# Altium PCB roneMotorBoard-v9.PcbDoc (part 1 of 2)
Units mil, origin at the board's own origin, x right, y up, seen from the top; angles counter-clockwise.
Board outline 3702 x 3936.38 mil, 2 copper layers (Top Layer, Bottom Layer); 104 components, 83 nets, 397 pads, 285 vias.
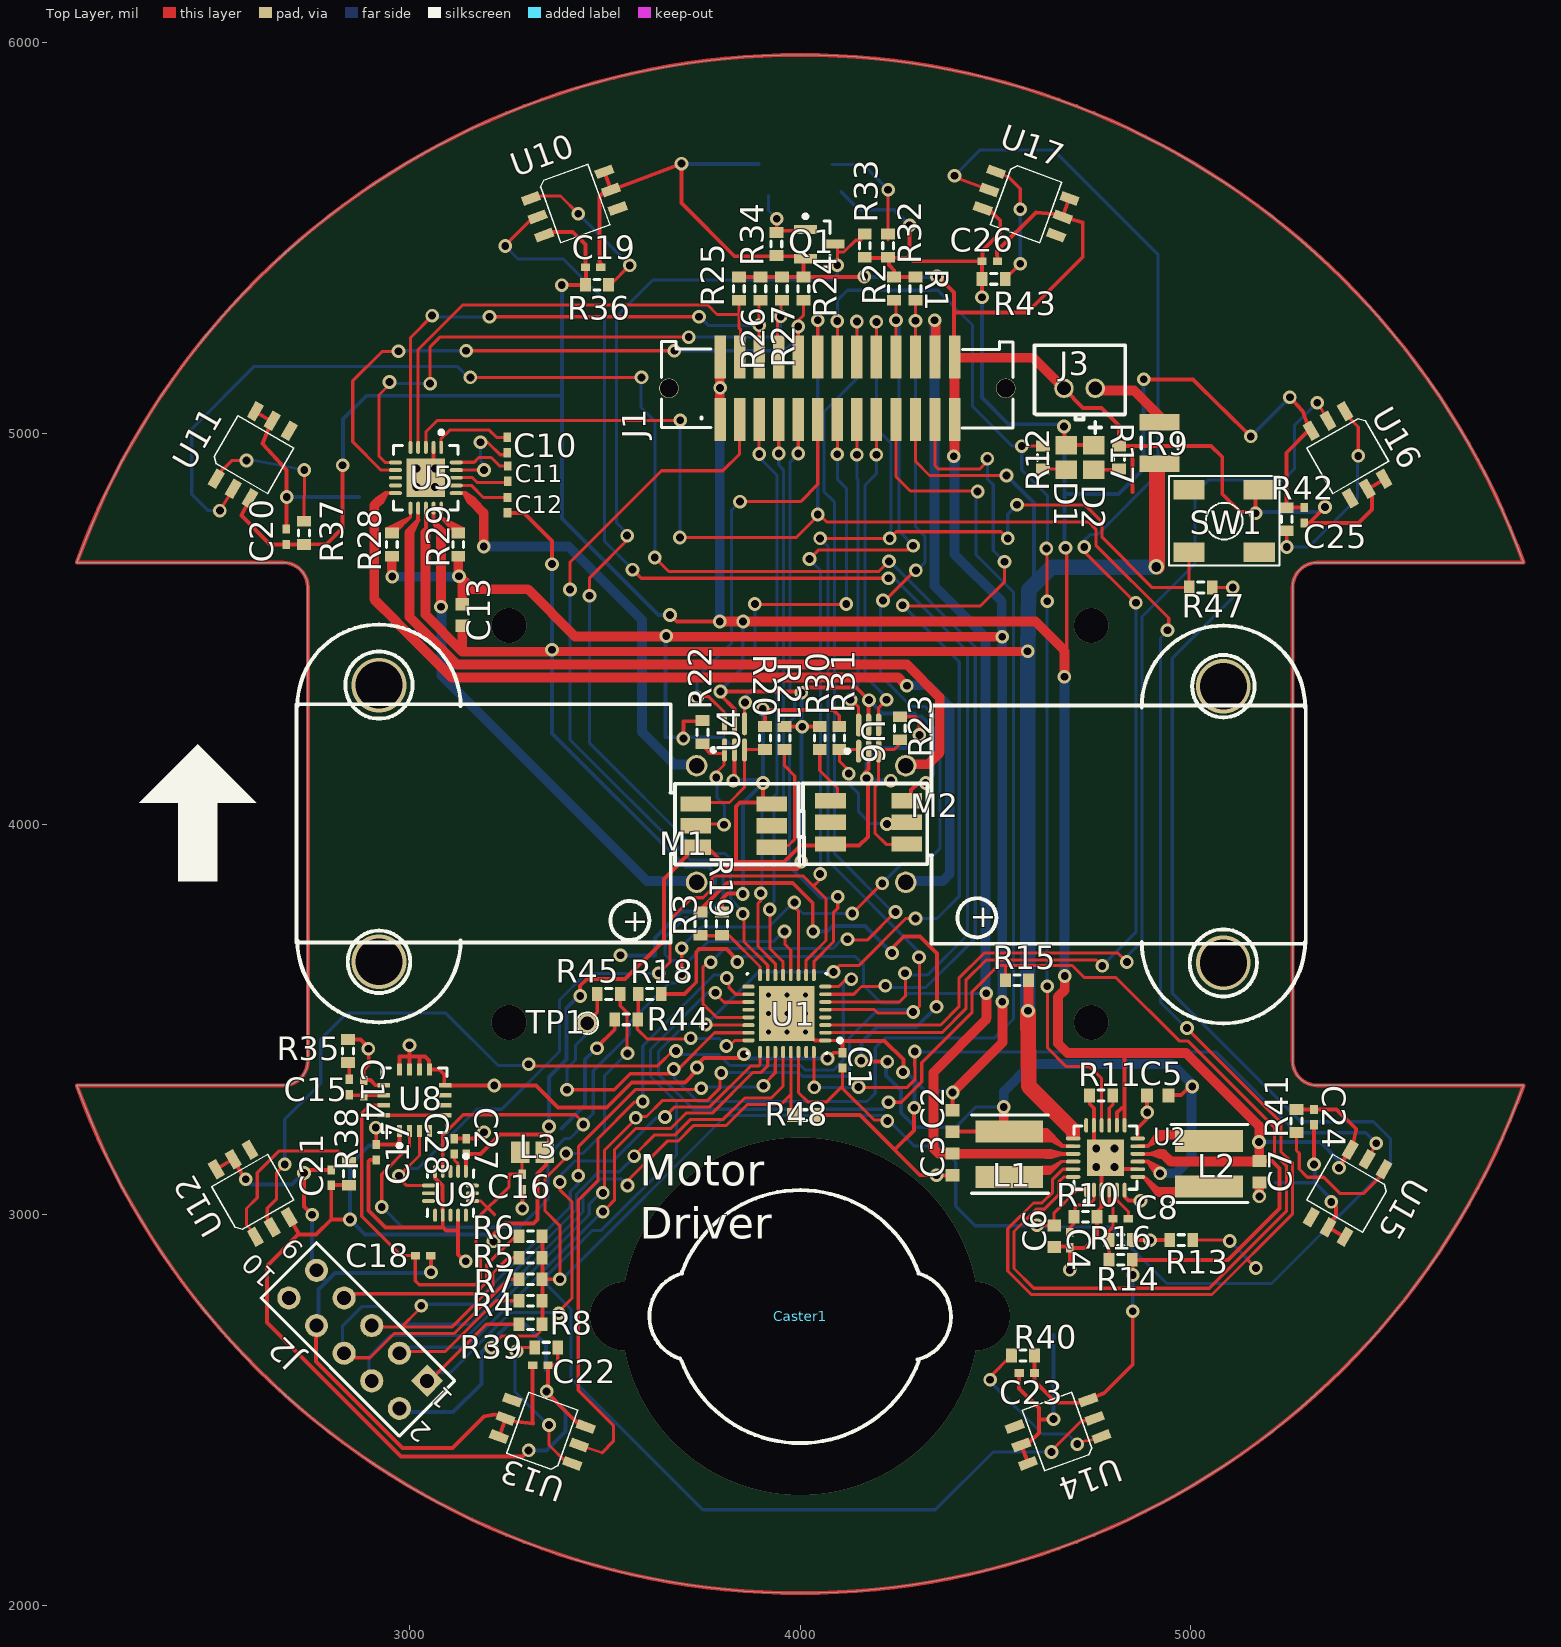
[diagram p0: Top Layer view]
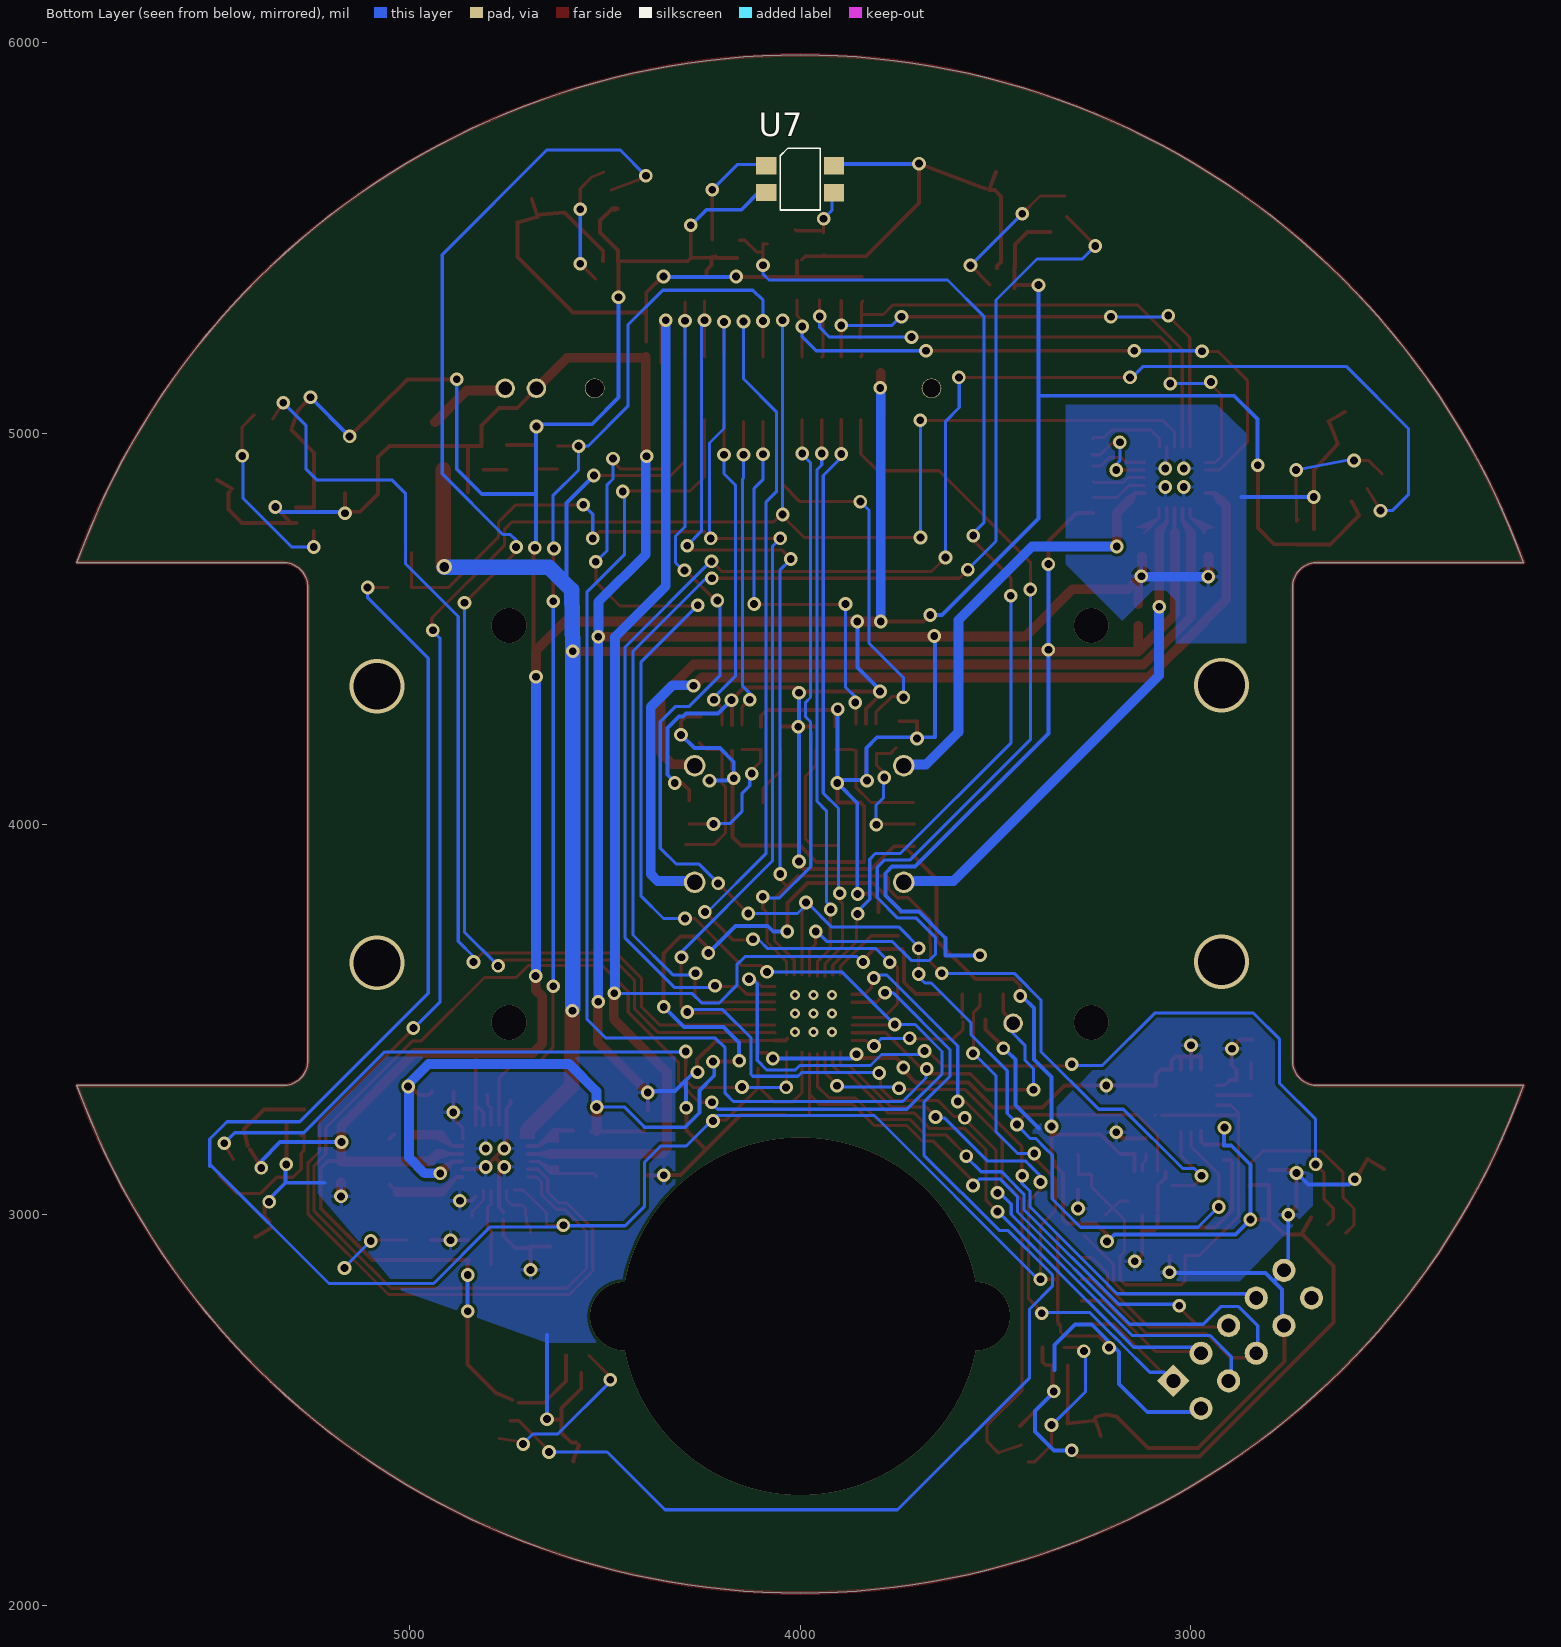
[diagram p1: Bottom Layer view, seen from below]

## Layer stack, top to bottom
Top Layer: signal copper 1.4
Dielectric: dielectric 12.6, FR-4, Dk 4.8
Bottom Layer: signal copper 1.4

## Board outline
2149,3331 2677,3331 ccw(c2677,3394) 2740,3394 2740,4606 ccw(c2677,4606) 2677,4669 2149,4669 cw(c4000,4000) 5851,4669 5323,4669 ccw(c5323,4606) 5260,4606 5260,3394 ccw(c5323,3394) 5323,3331 5851,3331 cw(c4000,4000)

## Design rules (kind name [scope] priority, off if disabled: settings)
Clearance [All] p1: gap=8
PolygonConnect [All] p1: connectstyle=Relief reliefconductorwidth=10 reliefentries=4 polygonreliefangle="90 Angle"
RoutingVias RoutingVias_4 [(IsVia AND InNetClass('All Nets'))] p1: holewidth=20 width=35 viastyle="Through Hole" minholewidth=20 minwidth=35 maxholewidth=20 maxwidth=35
RoutingVias RoutingVias_3 [(IsVia AND InNetClass('All Nets'))] p2: holewidth=20 width=35 viastyle="Through Hole" minholewidth=20 minwidth=35 maxholewidth=20 maxwidth=35
RoutingVias RoutingVias_2 [(IsVia AND InNetClass('All Nets'))] p3: holewidth=20 width=35 viastyle="Through Hole" minholewidth=20 minwidth=35 maxholewidth=20 maxwidth=35
RoutingVias RoutingVias_1 [(IsVia AND InNetClass('All Nets'))] p4: holewidth=20 width=35 viastyle="Through Hole" minholewidth=20 minwidth=35 maxholewidth=20 maxwidth=35
RoutingVias [All] p5: holewidth=20 width=35 viastyle="Through Hole" minholewidth=20 minwidth=35 maxholewidth=20 maxwidth=35
SMDNeckDown [All] p1: percent=50.000
SilkscreenOverComponentPads [All] p1: minsilkscreentomaskgap=10
SolderMaskExpansion [All] p1: expansion=4
Width "Schematic Width Constraint_8" [InNet('3.3V')] p1: maxlimit=100 minlimit=10 preferedwidth=25 minimp=50.000000 maximp=50.000000 favimp=50.000000
Width "Schematic Width Constraint_7" [InNet('VBAT')] p2: maxlimit=50 minlimit=10 preferedwidth=25 minimp=50.000000 maximp=50.000000 favimp=50.000000
Width "Schematic Width Constraint_6" [InNet('VBAT +300')] p3: maxlimit=25 minlimit=10 preferedwidth=25 minimp=50.000000 maximp=50.000000 favimp=50.000000
Width "Schematic Width Constraint_5" [InNet('NetJ3_1')] p4: maxlimit=25 minlimit=10 preferedwidth=25 minimp=50.000000 maximp=50.000000 favimp=50.000000
Width "Schematic Width Constraint_4" [InNet('NetL2_1')] p5: maxlimit=25 minlimit=10 preferedwidth=25 minimp=50.000000 maximp=50.000000 favimp=50.000000
Width "Schematic Width Constraint_3" [InNet('NetL2_2')] p6: maxlimit=25 minlimit=10 preferedwidth=25 minimp=50.000000 maximp=50.000000 favimp=50.000000
Width "Schematic Width Constraint_2" [InNet('5VUSB')] p7: maxlimit=25 minlimit=10 preferedwidth=25 minimp=50.000000 maximp=50.000000 favimp=50.000000
Width "Schematic Width Constraint" [InNet('GND')] p8: maxlimit=25 minlimit=10 preferedwidth=25 minimp=50.000000 maximp=50.000000 favimp=50.000000
Width "Schematic Width Constraint_12" [InNet('MOT_0B')] p9: maxlimit=25 minlimit=10 preferedwidth=20 minimp=50.000000 maximp=50.000000 favimp=50.000000
Width "Schematic Width Constraint_11" [InNet('MOT_0A')] p10: maxlimit=25 minlimit=10 preferedwidth=20 minimp=50.000000 maximp=50.000000 favimp=50.000000
Width "Schematic Width Constraint_10" [InNet('MOT1_B')] p11: maxlimit=25 minlimit=10 preferedwidth=20 minimp=50.000000 maximp=50.000000 favimp=50.000000
Width "Schematic Width Constraint_9" [InNet('MOT1_A')] p12: maxlimit=25 minlimit=10 preferedwidth=20 minimp=50.000000 maximp=50.000000 favimp=50.000000
Width MotorWidth [InNetClass('MotorNets')] p13: maxlimit=25 minlimit=8 preferedwidth=25
Width [All] p14: maxlimit=8 minlimit=8 preferedwidth=8
27 further rules are at their usual default settings.

## Classes and differential pairs
component class motorEncoder: C10 C11 C12 C13 Caster1 CasterBack1 M1 M2 M? R20 R21 R22 R23 R24 R25 R26 R27 R28 R29 R30 R31 U4 U5 U6
component class BumpSensors: C19 C20 C21 C22 C23 C24 C25 C26 R36 R37 R38 R39 R40 R41 R42 R43 U10 U11 U12 U13 U14 U15 U16 U17
component class GyroAccelHeaders: C14 C15 C16 C17 C18 C27 C28 L3 R35 U8 U9
component class MSP430: C1 J1 J2 R1 R2 R4 R5 R6 R7 R8 R45 R47 R48 SW1 TP1 U1
component class power: C2 C3 C4 C5 C6 C7 C8 C9 D1 D2 J3 L1 L2 R3 R9 R10 R11 R12 R13 R14 R15 R16 R17 R18 R19 R44 U2 U3
component class LineCliffSensors: Q1 R32 R33 R34 U7

## Components (designator, comment, footprint, x,y, rotation, side; value= is the part's Value field where it differs from the comment)
C1 "Cap Semi" CAPC1005L 4108,3395 r270 top
C2 "Cap" CAPC1608L 4390,3240 r270 top
C3 "Cap" CAPC1608L 4390,3129 r90 top
C4 "Cap" CAPC1005L 4690,2935 r90 top
C5 "Cap" CAPC1608L 4915,3305 r180 top
C6 "Cap" CAPC1608L 4650,2945 r270 top
C7 "Cap" CAPC1608L 5175,3110 r90 top
C8 "Cap" CAPC1005L 4820,2990 r0 top
C10 "Cap Semi" CAPC1005L 3250,4970 r90 top
C11 "Cap Semi" CAPC1005L 3251.31,4896.63 r90 top
C12 "Cap Semi" CAPC1005L 3251,4816 r90 top
C13 "Cap Semi" CAPC1608L 3135,4535 r270 top
C14 "Cap Semi" CAPC1005L 2883,3324 r90 top
C15 "Cap Semi" CAPC1005L 2846,3327 r90 top
C16 "Cap Semi" CAPC1005L 3289,3084 r90 top
C17 "Cap Semi" CAPC1005L 2915,3160 r90 top
C18 "Cap Semi" CAPC1005L 3035,2895 r180 top
C19 "Cap Semi" CAPC1005L 3470,5425 r180 top
C20 "Cap Semi" CAPC1005L 2685,4735 r270 top locked
C21 "Cap Semi" CAPC1005L 2800,3095 r270 top
C22 "Cap Semi" CAPC1005L 3335,2615 r0 top
C23 "Cap Semi" CAPC1005L 4580,2595 r0 top
C24 "Cap Semi" CAPC1005L 5315,3250 r90 top locked
C25 "Cap Semi" CAPC1005L 5290,4790 r90 top
C26 "Cap Semi" CAPC1005L 4485,5440 r180 top locked
C27 "Cap Semi" CAPC1005L 3145,3175 r270 top
C28 "Cap Semi" CAPC1005L 3115,3175 r270 top
Caster1 "non connect" "3/4\"CASTER2" 4000,2740 r180 top locked
D1 "Charge" INDC2012L 4681,4938 r270 top
D2 "Power" INDC2012L 4751,4938 r270 top
J1 "HCOMM/MOT" "HeaderSM 13x2" 4095,5115 r90 top locked
J2 "JTAG" HDR2X5 3045,2575 r135 top
J3 "Bat" BatteryConnJST 4715,5115 r180 top
L1 "3.3uH" IndPow 4535,3155 r90 top
L2 "2.2uH" IndPow 5046,3131 r90 top locked
L3 "Inductor" INDC2012L 3315,3160 r0 top
M1 "motorEncoder_V7b" motorEncoder_V7b 3830,4000 r180 top locked
M2 "motorEncoder_V7b" motorEncoder_V7b 4175,4000 r0 top locked
Q1 "NPN" SOT-23 4049,5484 r0 top
R1 "Res3" RESC1608L 4295,5370 r90 top
R2 "Res3" RESC1608L 4240,5370 r90 top
R3 "Res3" RESC1608L 3745,3745 r90 top
R4 "Res3" RESC1608L 3310,2780 r0 top
R5 "Res3" RESC1608L 3310,2890 r0 top
R6 "Res3" RESC1608L 3310,2945 r0 top
R7 "Res Semi" RESC1608L 3310,2835 r0 top
R8 "Res3" RESC1608L 3310,2720 r0 top
R9 "Res3" RESC3225L 4920,4975 r90 top
R10 "Res3" RESC1608L 4730,2995 r180 top
R11 "Res3" RESC1608L 4770,3305 r180 top
R12 "Res3" RESC1608L 4621,4938 r270 top
R13 "Res3" RESC1608L 4975,2935 r0 top
R14 "Res3" RESC1608L 4820,2885 r180 top
R15 "Res3" RESC1608L 4555,3600 r0 top
R16 "Res3" RESC1608L 4820,2935 r0 top
R17 "Res3" RESC1608L 4816,4938 r270 top
R18 "Res3" RESC1608L 3615,3565 r0 top
R19 "Res3" RESC1608L 3800,3745 r270 top
R20 "" RESC1608L 3910,4220 r90 top
R21 "" RESC1608L 3960,4220 r90 top
R22 "" RESC1608L 3750,4235 r270 top
R23 "" RESC1608L 4255,4245 r270 top
R24 "Res3" RESC1608L 4008,5370 r90 top
R25 "Res3" RESC1608L 3843,5370 r90 top
R26 "Res3" RESC1608L 3898,5370 r90 top
R27 "Res3" RESC1608L 3953,5370 r90 top
R28 "Res3" RESC1608L 2955,4715 r270 top
R29 "Res3" RESC1608L 3125,4715 r270 top
R30 "" RESC1608L 4050,4220 r90 top
R31 "" RESC1608L 4100,4220 r270 top
R32 "Res3" RESC1608L 4225,5480 r90 top
R33 "Res3" RESC1608L 4165,5480 r270 top
R34 "Res3" RESC1608L 3939,5484 r270 top
R35 "Res3" RESC1608L 2843,3419 r270 top
R36 "Res3" RESC1608L 3480,5380 r180 top
R37 "Res3" RESC1608L 2730,4745 r270 top
R38 "Res3" RESC1608L 2845,3105 r270 top
R39 "Res3" RESC1608L 3350,2660 r0 top
R40 "Res3" RESC1608L 4570,2640 r0 top
R41 "Res3" RESC1608L 5270,3240 r90 top locked
R42 "Res3" RESC1608L 5245,4780 r90 top
R43 "Res3" RESC1608L 4495,5395 r180 top locked
R44 "Res3" RESC1608L 3555,3500 r0 top
R45 "Res3" RESC1608L 3510,3565 r0 top
R47 "Res3" RESC1608L 5025,4605 r0 top
R48 "Res3" RESC1608L 4010,3255 r180 top
SW1 "reset button" SwitchTall-TL330 5085,4775 r0 top
TP1 "TestPoint" TestPoint 3455,3490 r0 top
U1 "MSP430" MSP430_32PIN 3966,3515 r180 top locked
U2 "LTC3566" QFN-24 4781,3146 r90 top
U4 "schmit trigger" DCK(R-PDSO-C6) 3832,4223 r90 top
U5 "MOTOR-A3906" QFN-20 3042,4886 r270 top locked
U6 "schmit trigger" DCK(R-PDSO-C6) 4175,4220 r90 top
U7 "GP2S27TJ000F" GP2S27J0000F 4000,5650 r180 bottom locked
U8 "L3G4200D" L3G2004D 3013,3293 r90 top
U9 "MMA8452Q" MMA8452Q 3105,3055 r270 top
U10 "SFH9240-Z" SFH9240-Z 3422,5588 r20 top locked
U11 "SFH9240-Z" SFH9240-Z 2599,4945 r60 top locked
U12 "SFH9240-Z" SFH9240-Z 2599,3055 r120 top locked
U13 "SFH9240-Z" SFH9240-Z 3340,2445 r160 top locked
U14 "SFH9240-Z" SFH9240-Z 4660,2445 r200 top locked
U15 "SFH9240-Z" SFH9240-Z 5401,3055 r240 top locked
U16 "SFH9240-Z" SFH9240-Z 5401,4945 r300 top locked
U17 "SFH9240-Z" SFH9240-Z 4578,5588 r340 top locked

## Footprints (in the part's own frame and the unit in brackets; to place one, negate y for a bottom-side part, rotate by r counter-clockwise, add the part's x,y. Pads: shape width x height; smd on the part's side, far side on the other; paste and mask are expansions set on the pad)
"3/4\"CASTER2" [mil] "3/4\" caster for board"
  silkscreen extent -386,-323 386,324
BatteryConnJST [mil] "Connector for Battery"
  round 50 hole 35: 1(-40,0) 2(40,0)
  silkscreen extent -117,-110 116,115
CAPC1005L [mm] "Chip Capacitor, Body 1.0x0.5mm, IPC High Density"
  rect 0.6x0.5 smd: 1(-0.5,0) 2(0.5,0)
  body extent -0.55,-0.3 0.55,0.3, height 1.3
CAPC1608L [mm] "Chip Capacitor, Body 1.6x0.8mm, IPC High Density"
  rect 0.8x0.9 smd: 1(-0.7,0) 2(0.7,0)
  body extent -0.87,-0.48 0.87,0.48, height 1.3
DCK(R-PDSO-C6) [mm] "TSOP, 6-Leads, Body 2.2x1.4mm (max), Pitch 0.65mm, IPC Medium Density"
  oval 1.5x0.35 smd: 1(-0.85,0.65) 2(-0.85,0) 3(-0.85,-0.65) 4(0.85,-0.65) 5(0.85,0) 6(0.85,0.65)
  silkscreen extent -0.97,1.25 -0.73,1.5, body extent -0.7,-1.07 0.7,1.08, height 1.1
GP2S27J0000F [mil] "Phototransistor Output, Compact Reflective Photointerrupter"
  rect 52x44 smd: 1(-86.61,34.45) 2(-86.61,-33.74) 3(86.61,-34.45) 4(86.61,34.45)
  silkscreen extent -51,-79 51,79, body extent -59,-78 59,79, height 67
HDR2X5 [mm] "Connector; Header; 5x2 Position"
  rect 1.5x1.5 hole 0.9: 1(0,0)
  round 1.5 hole 0.9: 2(0,2.54) 3(2.54,0) 4(2.54,2.54) 5(5.08,0) 6(5.08,2.54) 7(7.62,0) 8(7.62,2.54) 9(10.16,0) 10(10.16,2.54)
  silkscreen extent -1.27,-1.27 11.43,3.81
"HeaderSM 13x2" [mm]
  rect 2.795x0.74 smd: 1(-2.032,7.62) 2(2.033,7.62) 3(-2.032,6.35) 4(2.033,6.35) 5(-2.032,5.08) 6(2.033,5.08) 7(-2.032,3.81) 8(2.033,3.81) 9(-2.032,2.54) 10(2.033,2.54) 11(-2.032,1.27) 12(2.033,1.27) 13(-2.032,0) 14(2.033,0) 15(-2.032,-1.27) 16(2.033,-1.27) 17(-2.032,-2.54) 18(2.033,-2.54) 19(-2.032,-3.81) 20(2.033,-3.81) 21(-2.032,-5.08) 22(2.033,-5.08) 23(-2.032,-6.35) 24(2.033,-6.35) 25(-2.032,-7.62) 26(2.033,-7.62)
  round 1.27 hole 1.19: c1(0,10.947) c2(0,-10.947)
  silkscreen extent -2.59,-11.43 3.06,11.43
INDC2012L [mm] "Chip Inductor, Body 2.0x1.2mm, IPC High Density"
  rect 1.2x1.4 smd: 1(-0.8,0) 2(0.8,0)
  body extent -1.1,-0.7 1.1,0.7, height 0.55
IndPow [mil]
  rect 56.5x173 smd: 1(-58.25,0) 2(58.25,0)
  silkscreen extent -100,-100 100,97
L3G2004D [mm] "gyroscope"
  rect 0.8x0.3 smd: 1(-2,0.975) 2(-2,0.325) 3(-2,-0.325) 4(-2,-0.975) 9(2,-0.975) 10(2,-0.325) 11(2,0.325) 12(2,0.975)
  rect 0.3x0.8 smd: 5(-0.975,-2) 6(-0.325,-2) 7(0.325,-2) 8(0.975,-2) 13(0.975,2) 14(0.325,2) 15(-0.325,2) 16(-0.975,2)
  silkscreen extent -3.07,-2.1 2.1,2.1, body extent -2.08,-2.08 2.07,2.07, height 1.1
MMA8452Q [mm] "accelerometer-v9"
  oval 0.85x0.25 smd: 1(-1.425,1) 2(-1.425,0.5) 3(-1.425,0) 4(-1.425,-0.5) 5(-1.425,-1) 9(1.425,-1) 10(1.425,-0.5) 11(1.425,0) 12(1.425,0.5) 13(1.425,1)
  oval 0.25x0.85 smd: 6(-0.5,-1.425) 7(0,-1.425) 8(0.5,-1.425) 14(0.5,1.425) 15(0,1.425) 16(-0.5,1.425)
  silkscreen extent -2.52,-1.52 1.5,1.53, body extent -1.5,-1.5 1.5,1.5, height 1
motorEncoder_V7b [mm] "Precision Wire Wound Inductor, 2-Leads, Body 2.5x2.3mm, IPC Medium Density"
  rect 2x1 smd: A(-2.475,1.502) C(2.475,1.502) E1(2.475,0.102) E2(2.475,-1.298) K(-2.475,-1.298) NC(-2.475,0.102)
  round 1.4 hole 1: M1(2.417,3.79) M2(2.417,-3.79)
  Mechanical 1 keep-out region: 4.291,-7.78 28.421,-7.78 28.421,7.714 4.291,7.714
  silkscreen extent -4.55,-12.96 28.42,12.89
MSP430_32PIN [mm] "32 pin QFN"
  oval 0.8x0.25 smd: 1(-2.5,1.75) 2(-2.5,1.25) 3(-2.5,0.75) 4(-2.5,0.25) 5(-2.5,-0.25) 6(-2.5,-0.75) 7(-2.5,-1.25) 8(-2.5,-1.75) 17(2.5,-1.75) 18(2.5,-1.25) 19(2.5,-0.75) 20(2.5,-0.25) 21(2.5,0.25) 22(2.5,0.75) 23(2.5,1.25) 24(2.5,1.75)
  oval 0.25x0.8 smd: 9(-1.75,-2.5) 10(-1.25,-2.5) 11(-0.75,-2.5) 12(-0.25,-2.5) 13(0.25,-2.5) 14(0.75,-2.5) 15(1.25,-2.5) 16(1.75,-2.5) 25(1.75,2.5) 26(1.25,2.5) 27(0.75,2.5) 28(0.25,2.5) 29(-0.25,2.5) 30(-0.75,2.5) 31(-1.25,2.5) 32(-1.75,2.5)
  rect 3.6x3.6 smd: 33(0,0)
  silkscreen extent -3.58,-2.6 2.6,2.6, body extent -2.58,-2.57 2.57,2.58, height 1
QFN-20 [mm] "QFN, 20-Leads, Body 4.2x4.2mm (max), Pitch 0.50mm, IPC Medium Density"
  oval 0.85x0.25 smd: 1(-1.975,1) 2(-1.975,0.5) 3(-1.975,0) 4(-1.975,-0.5) 5(-1.975,-1) 11(1.975,-1) 12(1.975,-0.5) 13(1.975,0) 14(1.975,0.5) 15(1.975,1)
  oval 0.25x0.85 smd: 6(-1,-1.975) 7(-0.5,-1.975) 8(0,-1.975) 9(0.5,-1.975) 10(1,-1.975) 16(1,1.975) 17(0.5,1.975) 18(0,1.975) 19(-0.5,1.975) 20(-1,1.975)
  rect 2.5x2.5 smd: 21(0,0)
  silkscreen extent -3.07,-2.1 2.1,2.1, body extent -2.07,-2.07 2.07,2.07, height 0.8
QFN-24 [mm] "QFN, 24-Leads, Body 4.1x4.1mm (max), Pitch 0.50mm, IPC Medium Density"
  oval 0.95x0.25 smd: 1(-2.1,1.25) 2(-2.1,0.75) 3(-2.1,0.25) 4(-2.1,-0.25) 5(-2.1,-0.75) 6(-2.1,-1.25) 13(2.1,-1.25) 14(2.1,-0.75) 15(2.1,-0.25) 16(2.1,0.25) 17(2.1,0.75) 18(2.1,1.25)
  oval 0.25x0.95 smd: 7(-1.25,-2.1) 8(-0.75,-2.1) 9(-0.25,-2.1) 10(0.25,-2.1) 11(0.75,-2.1) 12(1.25,-2.1) 19(1.25,2.1) 20(0.75,2.1) 21(0.25,2.1) 22(-0.25,2.1) 23(-0.75,2.1) 24(-1.25,2.1)
  rect 2.4x2.4 smd: 25(0,0)
  silkscreen extent -3.02,-2.05 2.05,2.05, body extent -2.05,-2.05 2.05,2.05, height 0.8
RESC1608L [mm] "Chip Resistor, Body 1.6x0.8mm, IPC High Density"
  rect 0.7x0.9 smd: 1(-0.75,0) 2(0.75,0)
  silkscreen extent -0.2,-0.35 0.2,0.35, body extent -0.85,-0.48 0.85,0.48, height 0.9
RESC3225L [mm] "Chip Resistor, Body 3.2x2.5mm, IPC High Density"
  rect 1.1x2.6 smd: 1(-1.35,0) 2(1.35,0)
  silkscreen extent -0.4,-1.2 0.4,1.2, body extent -1.68,-1.32 1.68,1.32, height 0.9
SFH9240-Z [mil] "Reflective Interrupter with Schmitt-Trigger"
  rect 47x24 smd: 1(-100,50) 2(-100,0) 3(-100,-50) 4(100,-50) 5(100,0) 6(100,50)
  silkscreen extent -67,-83 67,83, body extent -59,-78 59,79, height 67
SOT-23 [mm] "SOT23, 3-Leads, Body 3.0x2.5mm (max), Pitch 0.95mm, IPC Medium Density"
  rect 1.5x0.6 smd: 1(-0.9,0.95) 2(-0.9,-0.95) 3(0.9,0)
  silkscreen extent -1.02,-1.5 0.7,1.92, body extent -0.7,-1.5 0.7,1.5, height 1.2
SwitchTall-TL330 [mil] "Small SMDTall Tact Switch E-Switch TL330"
  rect 80x50 smd: 1(-90,80) 2(90,80) 3(-90,-80) 4(90,-80)
  silkscreen extent -141,-114 141,115
TestPoint [mil]
  round 50 hole 35: 1(0,0)
  silkscreen extent -28,-28 28,28

## Part data
C1 C10 C11 C12 C13 C14 C15 C16 C17 C18 C19 C20 C21 C22 C23 C24 C25 C26 C27 C28: "Capacitor (Semiconductor SIM Model)"
C2 C3 C4 C5 C6 C7 C8: "Capacitor"
Caster1: library part "Caster 3/4in", "This is just a space saver to get the caster onto the pcb"
D1 D2: library part LED2, "Typical RED, GREEN, YELLOW, AMBER GaAs LED"
J1: library part HCOMM/HMOT, "Header, 2X20, 50mil, IDC"
J2: library part "Header 5X2", "Header, 5-Pin, Dual row"
J3: library part BatteryConnJST
L1 L2: library part Inductor
R1 R2 R3 R4 R5 R6 R8 R9 R10 R11 R12 R13 R14 R15 R16 R17 R18 R19 R24 R25 R26 R27 R28 R29 R32 R33 R34 R35 R36 R37 R38 R39 R40 R41 R42 R43 R44 R45 R47 R48: "Resistor"
R7: "Semiconductor Resistor"
R20 R21 R22 R23 R30 R31: library part Res3, "Resistor"
SW1: library part Switch-TL330
U1: library part MSP430_32pin
U8: "3axis gyroscope, SPI"

## Via types
v1: diameter 35, hole 20, Top Layer to Bottom Layer, 252 vias
v2: diameter 25.98, hole 12.99, Top Layer to Bottom Layer, tented top, 9 vias
v3: diameter 35, hole 20, Top Layer to Bottom Layer, tented top, 8 vias
v4: diameter 89, hole 89, Top Layer to Bottom Layer, 8 vias
v5: diameter 140, hole 120, Top Layer to Bottom Layer, 4 vias
v6: diameter 175, hole 175, Top Layer to Bottom Layer, 2 vias
v7: diameter 40, hole 25, Top Layer to Bottom Layer, 1 vias
v8: diameter 915, hole 915, Top Layer to Bottom Layer, 1 vias

## Nets (pads, with @x,y where several pads share a name; then routed paths per layer and width w, separated by ;. In a path a pad name is that pad's centre, name@x,y a point inside that pad or via, vN(x,y) a via of type N, cw(c..) or ccw(c..) an arc to the next point about the centre after c; other vN are vias at no path point)
3.3LDO: C1.2 C6.1 J2.2 R4.2 R5.2 R6.2 R7.2 R8.2 R45.2 R47.2 U1.30 U2.1 | length 7070.1
  Top Layer w8: v1@3211,2664 3237,2690 3324,2690 3334,2700 3334,2714.47 R8.2@3339.53,2720 R8.2@3335.97,2720 ; v1(3385,2835) 3385,2972 3347,3010 3347,3092 3397,3142 v1@3404,3142 ; R45.2@3539.53,3565 3539.53,3534.47 3557,3517 3557,3414 v1(3558,3413) ; U1.30@3995.53,3416.57 3995.53,3312.47 4019,3289 4068,3289 4108,3329 ; C1.2@4108,3375.31 4108,3324 4189,3243 4210,3243 v1@4220,3233 ; v1(4606,2973) 4649,2973 4649,3004 4708.48,3063.48 U2.1@4731.79,3063.48 ; R47.2@5054.53,4605 v1(5107,4605)
  Top Layer w10: R8.2@3341,2727 3341,2835 R6.2@3341,2948 ; R7.2@3342,2835 v1(3385,2835) v1@3392,2835
  Bottom Layer w8: v1@3392,2843 3399,2843 3810,3254 4214,3254 4292,3176 4357,3176 4398,3135 4398,3022 4448,2972 v1@4596,2972 ; v1@3405,3157 3444,3157 3499,3212 3499,3356 3557,3414 v1(3558,3413) ; v1@4614,2969 4793,2969 4938,2824 5206,2824 5511,3129 ; v1(5107,4605) 5107,4579 4952,4424 4952,3567 5281,3238 5467,3238 5511,3194 5511,3129 ; 5511,3124 5511,3129
  Bottom Layer w10: J2.2@2998.42,2495 3112,2495 3184,2567 3184,2649 3254,2719 3297,2719 3349,2667 3349,2603
  other v1: 3210,2660 3401,3157 4223,3240
3.3V: C7.2 C17.2 C19.2 C20.2 C21.2 C22.2 C23.2 C24.2 C25.2 C26.2 C27.2 D1.1 D2.1 J1.1 J1.2 L3.2 M1.C M2.C R1.2 R2.2 R14.1 R21.2 R30.2 R32.1 R33.2 R36.2 R37.2 R38.2 R39.2 R40.2 R41.2 R42.2 R43.2 U2.10 U2.13 U2.14 U4.5 U6.5 U7.2 U8.1 U9.1 U10.3 U11.3 U12.3 U13.3 U14.3 U15.3 U16.3 U17.3 | length 17878
  Top Layer w10: U11.3@2589,4825 2570,4789 2643.53,4715.47 R37.2@2730,4715.47 ; U12.3@2692.3,2993.4 2718,2949 ; R37.2@2730,4716 2788,4716 2829,4757 v1(2829,4918) ; C21.2@2800,3075.31 2800,2988 ; C21.2@2800,3076 2849,3076 R38.2@2850,3075 ; v1(2848,2988) 2800,2988 ; C17.2@2915,3179.69 v1@2915,3219 ; C17.2@2919,3180 2967,3180 2974.61,3187.61 U8.1@2974.61,3214.26 ; U9.1@3144.37,3111.1 3144.37,3153.37 C27.2@3145,3154 ; C27.2@3145,3155.31 3182.31,3155.31 3232,3205 3349,3205 3357,3197 ; v1@3215,2931 v1(3215,2932) ; v1@3215,2949 3244,2978 3318,2978 3328,2988 3328,3106 3349,3127 3349,3137 3355.5,3143.5 L3.2@3355.5,3159 ; v1(3305,2397) 3289,2381 2978.54,2381 2635,2724.54 2635,2869 2715,2949 2718,2949 ; v1(3351,2548) 3351,2546 3403.69,2493.31 U13.3@3438,2459 ; v1@3351,2550 3354.69,2553.69 C22.2@3354.69,2615 ; C22.2@3354,2615 C22.2@3354.69,2615 ; L3.2@3357,3162 3357,3197 ; v1(3357,3226) 3357,3197 ; U10.3@3359,5515 3418,5515 3450.31,5482.69 C19.2@3450.31,5425 ; R39.2@3379.53,2660 3379.53,2623.53 3371,2615 C22.2@3354.69,2615 ; v1(3390,5379) R36.2@3446,5379 ; v1(3437,3560) 3437,3586 3454,3603 3552,3603 3651,3702 3651,3859.32 M1.C@3732.56,3940.88 ; R36.2@3452,5371 C19.2@3452,5426.53 ; v1(3667,4535) 3684,4518 v1(3794,4518) ; M1.C@3708.31,3943 3760,3943 3818,3885 3992,3885 v1@4007,3900 ; v1@3794,4332 3832,4294 U4.5@3832,4256.46 ; v1@3798,4339 v1@3998,4339 ; R21.2@3960,4249.53 R30.2@4048.53,4249.53 ; v1@4008,4349.5 4143.5,4349.5 v1@4175,4318 ; R33.2@4162,5448 4212.47,5448 R32.1@4217,5452.53 ; U6.5@4175,4253.46 v1@4175,4317 ; R32.1@4213.47,5449 R32.1@4225,5449 ; R32.1@4225,5450.47 R32.1@4225,5449 ; R32.1@4227,5450 R32.1@4227,5449 ; R2.2@4230.53,5399.53 R2.2@4240,5399.53 ; 4280,5447 4278,5449 R32.1@4227,5449 ; v1(4280,5532) 4280,5448 4288,5440 4318,5440 C26.2@4465.31,5440 R43.2@4465.31,5399.69 ; M2.C@4284,4060 4284,4087 4301,4104 v1@4319,4104 ; R1.2@4295,5399.53 R2.2@4240,5399.53 ; v1(4465,5348) R43.2@4465,5394 ; C26.2@4466,5440 4466,5468 4512,5514 4512,5544 4480.78,5575.22 U17.3@4466.93,5575.22 U17.3@4473.39,5572.61 ; U17.3@4472,5574 U17.3@4473.39,5572.61 ; U17.3@4475,5571 U17.3@4473.39,5572.61 ; R40.2@4599.53,2640 4599.53,2574.47 4655,2519 U14.3@4721,2519 ; D1.1@4676,4977 v1@4676,5017 ; D1.1@4681,4969.5 D2.1@4749.5,4969.5 ; 4682,4448 v1@4682,4707 ; U14.3@4736.87,2526.19 4778,2544 4851,2617 v1(4851,2753) ; D2.1@4750.5,4970 D2.1@4751,4969.5 ; U2.14@4810.53,3228.83 4810.53,3261.49 4823.02,3273.98 4830.21,3273.98 4830.21,3409.79 ; U2.13@4830.21,3228.83 4830.21,3273.19 ; R14.1@4847,2884 5095,2884 5227,3016 5227,3118.33 5207.77,3137.56 C7.2@5175,3137.56 ; v1(4851,2846) R14.1@4851,2883 ; U2.10@4863.68,3156 4921,3156 ; v1(4879,5138) 5005,5138 v1(5153,4992) ; v1(5253,5092) 5286,5057 U16.3@5300,5016 ; R41.2@5270,3269.53 5372.47,3269.53 5423,3219 U15.3@5414,3177 ; C25.2@5290,4809.69 5244,4809.69 5244,4950 U16.3@5302,5008 ; v1@5378.29,3120.45 U15.3@5407.7,3166.6 ; 2718,2949 2761,2949 2800,2988 ; R32.1@4225,5449 R32.1@4227,5449 ; R32.1@4227,5449 4227,5430 4240,5417 R2.2@4240,5399.53
  Top Layer w25: v1(3794,4518) v1(3854,4518) 4602,4518 4672,4448 ; J1.1@3794,5053 J1.2@3794,5154 ; v1(4676,4377) 4676,4442 ; v1(4677,3611) 4677,3575 4660,3558 4660,3438 4684,3414 4987.72,3414 5174,3227.72 ; 4921,3156 4928.28,3156 4948.28,3136 C7.2@5175,3136 ; 5174.5,3217.5 5174.5,3138.06 C7.2@5175,3137.56
  Bottom Layer w10: v1@2830,4918 2830,5036 2890,5096 3385,5096 ; v1@2915,3219 2915,3177 2897,3177 2848,3128 v1(2848,2988) 2886,2950 3196,2950 v1@3214.5,2931.5 ; v1(3305,2397) 3351,2397 3399,2445 3399,2498 v1@3352,2545 ; v1(3357,3226) 3357,3352.04 3402,3397.04 3402,3529 3433,3560 v1(3437,3560) ; v1(3390,5379) 3390,4782 3637,4535 v1(3667,4535) ; v1@3802,4349 3853,4400 v1@3853,4511 ; v1(4003,3904) v1(4003,4336) ; U7.2@4105,5617 4150,5572 4240,5572 v1(4280,5532) ; v1(4176,4317) 4210,4283 4292,4283 4299.5,4275.5 4310.63,4275.5 4340,4246.13 4340,4126 v1@4322,4108 ; v1(4465,5348) 4465,5091 4533,5023 v1@4675,5023 ; v1@4676,4717 4676,4844 ; v1@4676,5017 4676,4844 ; v1(4851,2753) v1(4851,2846) ; v1(4879,5138) 4879,4908 4815,4844 4676,4844 ; v1(5153,4992) v1(5253,5092) ; v1(5174,3186) 5331,3186 5379,3138
  Bottom Layer w25: v1(3794,4518) v1@3794,5115 ; v1@4676,3611 v1(4676,4377)
  other v1: 5379,3120 2914,3223 4321,4105 4005,4249 3796,4339 4679,4707 4675,5017 3795,5116
5VUSB: C3.2 J1.24 R18.2 U2.21 | length 3714.4
  Top Layer w10: R18.2@3644.53,3565 3704,3565 3734,3595 3734,3673 3741,3680 3811,3680 v1@3840,3651 ; 4641,3156 U2.21@4698.32,3156
  Top Layer w25: J1.24@4347,5183 v1@4347,5288 ; 4354,3157 4341,3170 4341,3364.35 4476,3499.35 4476,3503 4477,3504 v1@4477,3559 ; 4355,3156 4641,3156
  Bottom Layer w8: v1@3845,3651 3855,3661 4141,3661 4162,3640 ; 4162,3638 4162,3587 4207,3542 4252,3542 4276,3566 4471,3566 v1@4472,3565
  Bottom Layer w10: v1@4472,3565 v1@4474,3567
  Bottom Layer w25: v1@4344,5288 4344,4609 4474,4479 v1@4474,3567 ; v1@4474,3565 v1@4474,3567 ; v1(4476,3567) v1@4474,3567
  other v1: 3839,3647 4344,5289
5VUSB_SENSE: R18.1 R44.2 U1.24 | length 396.3
  Top Layer w8: R44.2@3583,3494 3583,3475 3608,3450 v1@3709,3450 ; R44.2@3585.47,3504.53 R18.1@3585.47,3565 ; v1@3812,3425 3812,3426 3832.1,3446.1 U1.24@3867.57,3446.1
  Bottom Layer w8: v1@3710,3451 3793,3451 v1@3816,3428
  other v1: 3811,3432 3720,3452
BUMP0: U1.6 U10.2 | length 3268.4
  Top Layer w8: v1(3245,5479) v1@3245,5481 ; v1@3245,5484 v1@3245,5481 ; U10.2@3318,5554 v1@3245,5481 ; v1(3571,4651) 3593,4629 v1(4226,4629) ; U1.6@4064.43,3544.53 4253.53,3544.53 4269,3560 v1@4269,3604
  Bottom Layer w8: v1(3245,5479) 3278,5446 3394,5446 3499,5341 3499,4724 v1@3572,4651 ; v1(4226,4629) 4241,4629 4428,4442 4428,3716 4326,3614 v1@4266,3614
  other v1: 4268,3618
BUMP1: U1.7 U11.2 | length 4152.4
  Top Layer w8: v1(2515,4802) U11.2@2549,4858 ; v1(3156,5143) v1(3594,5143) ; v1(3628,4682) 3664,4646 4201,4646 v1(4227,4672) ; U1.7@4064.43,3564.21 4137.21,3564.21 4157,3584 v1@4214.32,3584
  Bottom Layer w8: v1(2515,4802) 2485,4802 2443,4844 2443,5011 2603,5171 3122,5171 v1@3150,5143 ; v1@3593,5140 3593,5066 3628,5031 v1(3628,4682) ; v1@4210,3585 4220.5,3574.5 4228,3582 4322,3582 4448,3708 4448,4453 v1@4229,4672
  other v1: 4218,3586
BUMP2: U1.8 U12.2 | length 2301.3
  Top Layer w8: U12.2@2650,2975 2636,2989 2636,3017 2660,3041 2660,3108 v1(2681,3129) ; v1@3307,3381 3635,3381 v1@3677,3423 ; U1.8@4064.43,3583.9 4097.9,3583.9 v1@4128.5,3614.5
  Bottom Layer w8: v1(2681,3129) 2681,3244 2773,3336 2773,3449 2840,3516 3093,3516 3227,3382 v1@3306,3382 ; v1@3675,3410 3792,3410 3820,3382 4001,3382 4012.5,3370.5 4085.5,3370.5 4110,3395 4110,3591 v1@4129,3610
  other v1: 3305,3385 3682,3419 4131,3603
BUMP3: U1.18 U13.2 | length 1619.8
  Top Layer w8: U13.2@3433.97,2410.8 3493,2391 3522,2420 3522,2461 3432,2551 3432,3037 3483,3088 3483,3195 3577,3289 3588,3289 v1@3597.5,3279.5 ; v1@3818,3609 3818,3581 3834.79,3564.21 U1.18@3867.57,3564.21
  Bottom Layer w8: v1@3597,3286 v1(3597,3290) 3597,3431.72 3779.28,3614 v1@3817,3614
  other v1: 3812,3606
BUMP4: U1.19 U14.2 | length 2946.8
  Top Layer w8: v1@3772,3577 3805,3544 3867.05,3544 U1.19@3867.57,3544.53 ; v1(4643,2393) 4643,2398 4645,2398 4720,2473 U14.2@4742,2473
  Bottom Layer w8: v1@3786,3568 3762,3568 3617,3423 3617,3354 3683.5,3287.5 3683.5,3152.5 3491,2960 3468.63,2960 3421.63,2913 3421,2913 3355.5,2847.5 3355.5,2845.87 3354,2844.37 3354,2818 3413,2759 3413,2583 3751,2245 4346,2245 4494,2393 v1(4643,2393)
  other v1: 3783,3568
BUMP5: U1.32 U15.2 | length 1732.5
  Top Layer w8: v1@4034.9,3334.1 U1.32@4034.9,3416.57 ; v1@4159,3321 4164,3326 4274.37,3326 4293.5,3345.13 4293.5,3380.22 4293,3380.72 v1@4293,3414 ; U15.2@5451,3141.6 5474.75,3182.57 v1@5475,3183
  Bottom Layer w8: v1@4050,3326 v1@4157,3326 ; v1@4291,3413 4295,3417 5063,3417 5270,3210 5447,3210 v1(5474,3183)
  other v1: 4036,3326 4149,3327 4293,3418
BUMP6: U1.3 U16.2 | length 2693.8
  Top Layer w8: U1.3@4064.43,3485.47 4359.47,3485.47 4406,3532 4406,3605 4471,3670 4813,3670 v1(4836,3647) ; v1(5323,5078) U16.2@5350,5036
  Bottom Layer w8: v1(4836,3647) 4836,3661 4875,3700 4875,3743 ; 4875,3744.65 4875,4531 5010.5,4666.5 5010.5,4846.5 5044,4880 5236,4880 5265,4909 5265,5020 v1(5323,5078)
BUMP7: U1.2 U17.2 | length 3570.8
  Top Layer w8: U1.2@4064.43,3465.79 4144,3466 ; 4145,3466 4363,3466 4424,3527 4424,3600 4476,3652 4492,3652 ; v1@4398,5655 U17.2@4484.03,5622.2 ; 4493.28,3652 4758,3652 v1(4773,3637) ; v1@4727,4711 4727,4697 4858,4566 v1@4858,4565
  Bottom Layer w8: v1(4395,5659) 4461,5725 4648,5725 4916,5457 4916,4896 4761,4741 4742,4741 v1@4727,4726 ; v1(4773,3637) 4859,3723 4859,3751 ; 4859,3751.28 v1(4859,4566) v1@4859,4568
  other v1: 4727,4709
CHRG: J1.14 R12.1 U2.16 | length 2823.9
  Top Layer w8: J1.14@4095,5195.02 v1(4095,5287) ; v1(4567,4967) R12.1@4621,4967 ; v1(4632,4570) v1@4632,4715 ; v1@4633,3583 4633,3427 4681,3379 4741.31,3379 4771.16,3349.16 U2.16@4771.16,3228.83
  Bottom Layer w8: v1@4095,5288 4095,5340 4121,5366 4352,5366 4441,5277 4441,5069 4543,4967 v1(4567,4967) 4567,4906 4633,4840 v1@4633,4718 ; v1@4632,3582 v1(4632,4570)
  other v1: 4632,3585 4630,4705
CHRGEN: J1.12 R13.2 U2.23 U5.3 | length 6092.6
  Top Layer w8: U5.3@3042,4963.76 3042,5003 3072,5033 v1(3693,5033) ; v1(3692,4733) 3990,4733 4049,4792 4068,4773 4738,4773 4756.5,4754.5 4756.5,4713.5 4943,4527 4943,4504 v1@4950,4497 ; J1.12@4045,5195.02 v1(4045,5289) ; U2.23@4698.32,3116.63 4671.63,3116.63 4646,3091 4646,3058 4618,3030 4597,3030 4531,2964 4531,2856 4591,2796 5053.67,2796 5260,3002.33 5260,3132 5230,3162 5230,3237 4997,3470 v1@4989,3470 ; R13.2@5004.53,2935 5097,2935 v1(5099,2933) ; 5144.33,2885.67 v1(5166,2864)
  Bottom Layer w8: v1(3692,4733) v1@3692,5031 ; v1@4045,4793 v1@4045,5278 ; v1@4949,4503 4922,4476 4922,3544 v1@4990,3476 ; v1(5099,2933) 5166,2866 v1(5166,2864)
  other v1: 4990,3478 4940,4496 4045,4792
CLIFF1: Q1.3 R33.1 U1.15 | length 2753.4
  Top Layer w8: v1(3461,4584) 3461,4630 v1@3567,4736 ; v1@3850,3774 3856,3768 3856,3699 3916.79,3638.21 U1.15@3916.79,3613.43 ; Q1.3@4084.43,5484 Q1.3@4095,5484 ; v1(4095,5430) Q1.3@4095,5484 ; Q1.3@4095,5486 Q1.3@4095,5484 ; 4097,5464 4112,5464 4142,5494 4155,5494
  Bottom Layer w8: v1(3461,4584) 3461,4207 3743.65,3924.35 3807.65,3924.35 3822,3910 3822,3807 3855,3774 v1@3848,3767 ; v1@3566,4735 3530,4771 3530,5299 3623,5392 4080,5392 4095,5407 v1(4095,5430)
  other v1: 3853,3770 3557,4738